# Altium PCB 主板-霍尔BC接地.PcbDoc (part 6 of 6)
Units mm, origin at the board's own origin, x right, y up, seen from the top; angles counter-clockwise.
Board outline 97.69 x 103.45 mm, 2 copper layers (Top Layer, Bottom Layer); 83 components, 83 nets, 266 pads, 295 vias.
Unrouted connection lines stored in the file: 11.
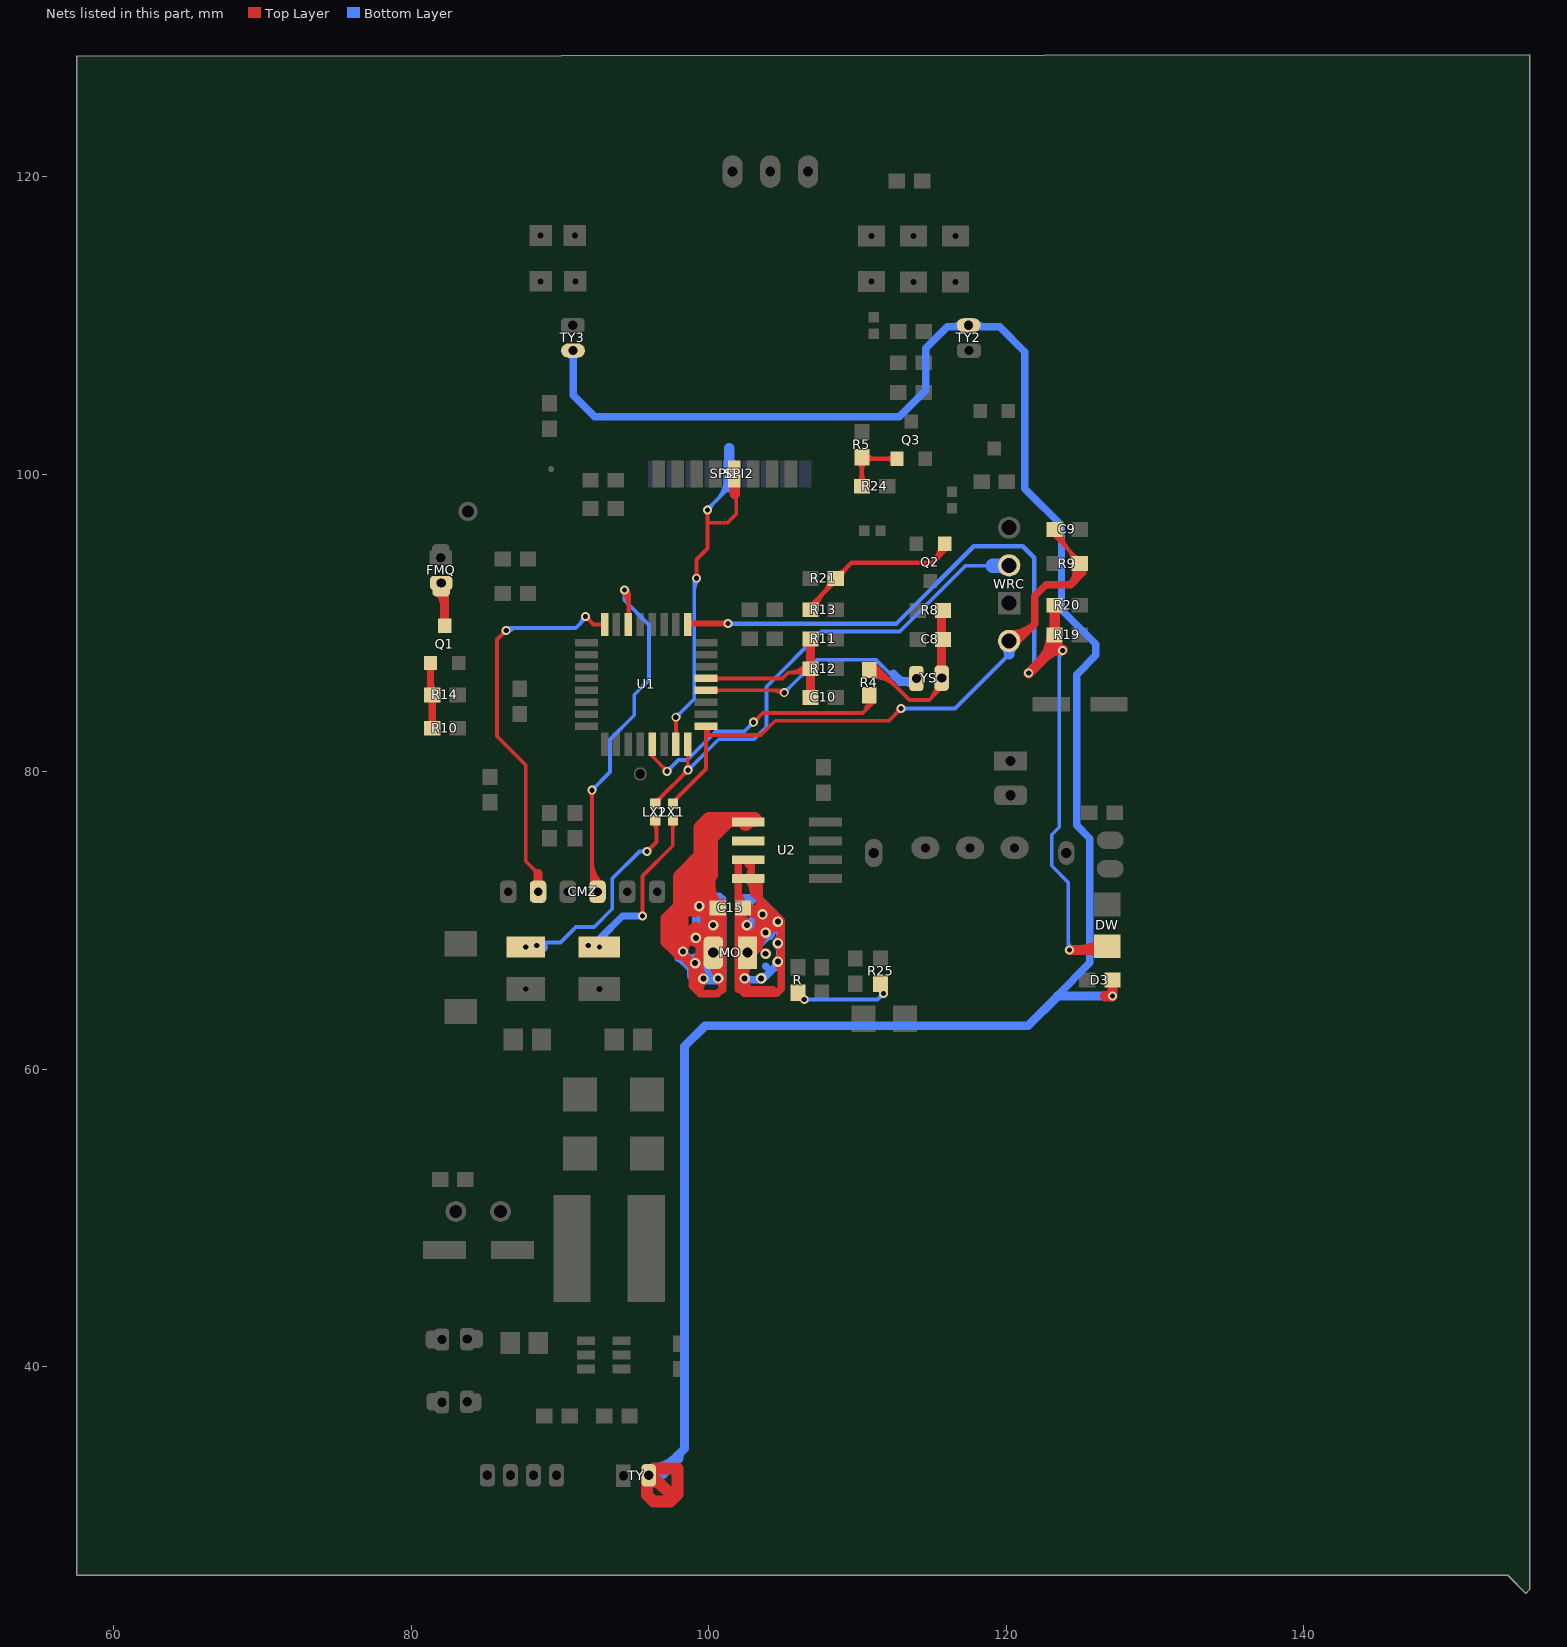
[diagram p6: the nets of this part, all layers, seen from the top]

## Via types
v1: diameter 0.6, hole 0.35, Top Layer to Bottom Layer, 117 vias
v2: diameter 0.7, hole 0.4, Top Layer to Bottom Layer, 104 vias
v3: diameter 0.8, hole 0.5, Top Layer to Bottom Layer, tented both sides, 32 vias
v4: diameter 0.8, hole 0.5, Top Layer to Bottom Layer, 15 vias
v5: diameter 1, hole 0.6, Top Layer to Bottom Layer, tented both sides, 5 vias
v6: diameter 1, hole 0.75, Top Layer to Bottom Layer, tented both sides, 5 vias
v7: diameter 3.4, hole 2.9, Top Layer to Bottom Layer, 4 vias
v8: diameter 0.65, hole 0.4, Top Layer to Bottom Layer, tented both sides, 2 vias
v9: diameter 0.8, hole 0.35, Top Layer to Bottom Layer, 2 vias
v10: diameter 0.7, hole 0.35, Top Layer to Bottom Layer, 2 vias
v11: diameter 1.1, hole 0.68, Top Layer to Bottom Layer, 2 vias
v12: diameter 0.62, hole 0.4, Top Layer to Bottom Layer, 1 vias
v13: diameter 0.95, hole 0.5, Top Layer to Bottom Layer, 1 vias
v14: diameter 0.9, hole 0.5, Top Layer to Bottom Layer, tented both sides, 1 vias
v15: diameter 0.7, hole 0.4, Top Layer to Bottom Layer, tented bottom, 1 vias
v16: diameter 0.8, hole 0.5, Top Layer to Bottom Layer, tented bottom, 1 vias

## Nets (pads, with @x,y where several pads share a name; then routed paths per layer and width w, separated by ;. In a path a pad name is that pad's centre, name@x,y a point inside that pad or via, vN(x,y) a via of type N, cw(c..) or ccw(c..) an arc to the next point about the centre after c; other vN are vias at no path point) (continued)
NetC4_1: C15.1 MO.2 U2.5 U2.6 | length 212.1
  Top Layer w0.254: 97.198,68.588 ccw(c98.273,69.662) v2@98.273,68.143 ; 97.206,69.723 97.231,69.698 ; 97.231,70.202 97.231,69.698 ; 97.447,67.958 97.585,67.958 97.828,67.958 ; 97.632,68.154 ccw(c98.273,68.795) v2@98.273,67.889 ; 97.642,67.958 cw(c97.642,67.289) v2@98.115,67.762 ; 97.826,67.958 ccw(c97.826,68.366) v2@98.115,68.077 ; v2@98.078,67.811 ccw(c97.828,67.672) 97.828,67.958 ; v2@98.114,68.077 cw(c97.828,68.361) 97.828,67.958 ; 97.079,69.367 97.231,69.52 97.231,69.647 ; 97.079,69.367 96.977,69.266 96.977,68.809 97.024,68.762 97.828,67.958 ; 97.079,69.367 97.561,69.367 97.257,69.672 ; 97.079,69.367 96.952,69.367 97.231,69.647 ; 97.231,69.647 97.257,69.672 ; 97.231,69.647 97.231,69.698 ; 97.231,69.698 97.257,69.672
  Top Layer w0.5: 97.184,69.295 97.561,69.672 97.565,69.676 ; 97.909,67.869 ccw(c97.909,68.284) 98.202,67.99 ccw(c97.725,68.468) 98.4,68.468 ; 98.091,70.202 97.024,70.202 ; v2@98.095,67.869 v2@98.146,67.818 ; 98.095,70.206 98.4,70.51 ; 98.095,70.507 98.098,70.51 98.4,70.51 ; 98.095,71.272 97.024,70.202 ; v2@98.178,67.608 ccw(c99.085,68.516) 99.085,67.232 cw(c99.085,67.903) 98.611,67.429 ; 98.179,68.301 98.4,68.301 ; v2@98.201,67.989 cw(c97.917,68.263) 97.917,67.869 ; v2@98.225,68.008 ccw(c98.066,68.301) 98.4,68.301 ; v2(98.273,67.92) 97.968,67.818 v2@98.146,67.818 ; v2@98.294,67.67 v2@98.146,67.818 ; v2@98.371,67.939 ccw(c99.474,68.159) v2@98.912,67.184 ; 98.551,67.489 cw(c98.982,67.92) 98.373,67.92 ccw(c99.595,67.92) 98.731,67.055 ; 98.882,66.4 cw(c99.817,66.4) v2@99.156,67.061 ; v2@98.882,67.158 98.222,67.818 v2@98.146,67.818 ; v2@99.015,67.061 cw(c98.108,66.155) v2@99.39,66.155 ; v2@99.015,67.203 ccw(c98.108,68.109) 99.39,68.109 ; v2@99.065,68.763 cw(c98.282,67.979) 99.39,67.979 ; 99.068,70.448 ccw(c98.807,70.841) v2@99.267,70.946 ; v2@99.093,68.924 ccw(c98.872,69.393) 99.39,69.393 ; 99.218,66.798 ccw(c100.205,67.063) v2@99.694,66.177 ; v2@99.269,70.939 cw(c98.858,70.814) 99.162,70.51 ; v2@99.278,71.018 cw(c98.4,71.525) 98.4,70.51 ; 99.307,68.472 ccw(c99.245,68.604) v2@99.39,68.604 ; v2@99.365,71.068 ccw(c99.365,71.922) 99.969,71.318 ; 99.39,65.236 cw(c100.499,65.236) v2@99.715,66.02 ; 99.39,66.945 ccw(c100.499,66.945) v2@99.715,66.162 ; v2@99.391,71.064 ccw(c99.573,71.738) 99.922,71.133 ; v2@99.442,71.031 ccw(c100.22,71.673) C15.1@100.124,70.669 ; v2@99.597,70.946 cw(c100.217,70.325) C15.1@100.697,71.059 ; 99.974,71.323 99.162,70.51 ; MO.2@100.025,68.573 ccw(c97.818,70.781) C15.1@100.94,70.781 ; MO.2@100.069,67.07 cw(c98.769,65.331) 100.94,65.331 ; MO.2@100.11,68.693 ccw(c99.306,69.266) v2@100.213,69.658 ; v2@100.252,69.782 ccw(c99.445,71.073) C15.1@100.928,70.731 ; v2@100.273,69.603 ccw(c100.002,68.781) 99.39,69.393 ; C15.1@100.31,70.839 cw(c99.161,70.79) 99.974,69.977 ; v2@100.31,69.797 ccw(c100.338,70.267) 100.797,70.162 ; MO.2@100.368,67.47 cw(c99.515,66.329) 100.94,66.329 ; MO.2@100.379,68.22 ccw(c99.025,69.574) 100.94,69.574 ; 100.402,66.634 cw(c99.86,66.22) v2@100.536,66.129 ; v2@100.401,69.724 cw(c101.33,69.973) 100.65,70.653 99.974,69.977 ; C15.1@100.423,70.641 ccw(c99.873,69.799) 99.162,70.51 ; C15.1@100.483,70.673 cw(c99.381,69.571) 100.94,69.571 ; v2@100.564,66.187 ccw(c99.658,67.093) MO.2@100.94,67.093 ; v2@100.579,66.034 cw(c100.149,65.403) 100.899,65.545 ; v2@100.58,66.033 cw(c100.142,65.366) 100.94,65.366 ; C15.1@100.94,71.245 100.94,65.43 100.584,65.075 99.416,65.075 99.314,65.176 ; 97.024,70.202 97.024,68.762 97.024,68.518 97.585,67.958 97.928,67.615 98.171,67.615 98.882,66.904 98.882,65.608 99.314,65.176 ; 97.917,67.869 97.739,67.869 97.828,67.958 97.917,67.869 ; 98.4,68.301 98.4,68.69 98.4,70.51 ; 98.4,70.51 99.162,70.51 ; 99.314,65.176 99.39,65.176 99.39,69.393 ; 99.39,69.393 99.974,69.977
  Top Layer w1: 97.561,69.672 97.561,69.367 97.561,68.918 98.095,68.385 ; 97.565,69.676 98.091,70.202 ; 98.098,70.51 98.505,70.917 98.628,70.917 ; v2@98.123,67.92 cw(c99.313,67.92) 98.471,68.761 ; 98.179,68.301 98.095,68.385 ; 98.381,68.671 cw(c99.136,67.916) v2@99.136,68.984 ; 98.984,71.525 ccw(c99.922,71.525) v2@99.259,70.862 ; v2@99.002,68.766 cw(c99.485,69.01) 99.103,69.393 98.4,68.69 ; v2@99.193,68.973 cw(c98.722,67.812) MO.2@99.974,67.812 ; v2@99.206,68.701 ccw(c98.531,69.977) 99.974,69.977 ; v2@99.409,71.111 ccw(c99.18,70.365) 98.628,70.917 ; v2@99.471,70.862 ccw(c98.255,72.077) 99.974,72.077 ; v2@99.471,71.074 cw(c98.255,69.858) 99.974,69.858 ; 99.974,69.263 cw(c100.74,69.263) v2@100.199,69.804 ; 99.974,69.436 cw(c101.974,69.436) C15.1@100.56,70.85 ; 99.974,69.458 ccw(c101.476,69.458) MO.2@100.414,68.396 ; 99.974,70.133 ccw(c100.74,70.133) v2@100.199,69.592 ; 99.974,71.323 99.974,69.977 ; 99.974,71.425 99.974,73.228 ; 99.974,72.264 ccw(c101.974,72.264) C15.1@100.56,70.85 ; 99.974,75.082 99.974,73.228 ; 99.999,69.526 cw(c100.478,69.398) v2@100.23,69.828 ; MO.2@100.533,67.691 99.974,68.25 99.974,69.977 ; 101.346,76.784 100.127,75.565 100.127,73.076 99.974,73.228 ; U2.5@102.489,76.505 U2.5@102.768,76.784 ; U2.5@103.073,76.784 100.025,76.784 99.466,76.225 99.466,74.32 98.095,72.949 98.095,71.272 98.095,70.507 98.095,70.206 98.095,68.385 ; 98.095,68.385 98.4,68.69 ; 98.4,68.69 cw(c99.111,67.978) 99.141,68.984 ccw(c99.111,67.978) 98.4,68.69 ; 98.4,68.69 ccw(c99.08,68.009) 98.124,67.903 cw(c99.08,68.009) 98.4,68.69 ; 98.628,70.917 98.984,71.272 98.984,73.863 99.162,74.041 99.974,73.228 ; C15.1@100.56,70.85 ccw(c101.211,69.799) 99.974,69.799 cw(c101.211,69.799) C15.1@100.56,70.85 ; 99.957,69.923 ccw(c100.522,70.074) 100.23,69.568 cw(c100.522,70.074) 99.957,69.923
  Bottom Layer w0.5: 97.968,67.451 cw(c98.341,67.451) v2@98.287,67.821 ; v2(98.273,67.92) 98.781,67.412 98.781,66.751 ; v2@98.372,67.909 ccw(c99.786,67.757) 98.781,66.751 ; v2@98.373,67.92 cw(c99.411,67.92) 98.677,68.654 ; 98.489,68.466 cw(c99.136,67.818) v2@99.136,68.734 ; 98.781,66.24 cw(c99.865,66.24) v2@99.151,67.057 ; v2@98.781,67.247 cw(c99.064,67.247) 99.012,67.525 ; v2@99.066,67.23 cw(c98.829,68.426) 97.968,67.564 ; 99.127,66.405 ccw(c99.644,66.923) v2@99.644,66.191 ; v2(99.136,68.834) v2@99.136,69.113 ; 99.136,70.196 cw(c100.106,70.196) v2@99.434,70.895 ; v2@99.185,67.12 ccw(c100.605,66.95) v2@99.593,65.938 ; v2@99.233,68.808 cw(c100.264,68.532) 99.73,69.457 ; v2@99.236,68.834 cw(c100.152,68.834) 99.504,69.482 ; 99.274,66.491 ccw(c99.839,66.817) v2@99.67,66.187 ; v2@99.277,70.919 cw(c98.546,70.517) 99.136,69.926 ; v2@99.279,70.917 cw(c98.838,70.657) 99.2,70.295 ; 99.293,70.201 99.2,70.294 ; 99.365,70.568 ccw(c99.365,70.828) 99.549,70.644 ; v2@99.365,71.068 ccw(c99.365,72.535) 100.403,71.498 ; v2@99.387,71.065 ccw(c99.685,72.374) 100.635,71.425 ; v2@99.465,70.968 cw(c100.258,70.968) 99.697,71.529 ; v2@99.565,66.151 cw(c99.136,66.476) 99.136,65.938 ; v2@99.596,66.178 cw(c99.265,66.779) 98.781,66.294 ; 99.6,69.698 cw(c100.045,69.698) 99.73,70.012 ; v2(99.644,66.091) v2@99.924,65.938 ; 99.656,70.751 ccw(c99.412,70.995) 99.709,71.171 ; v2@99.657,66.027 99.67,66.04 MO.2@99.67,67.081 ; v2@99.715,66.162 ccw(c100.254,66.7) 100.254,65.938 ; 99.827,69.22 cw(c99.136,69.911) 99.136,68.934 ccw(c99.136,70.954) v2@100.564,69.526 ; MO.2@99.829,68.79 ccw(c98.921,69.698) v2@100.205,69.698 ; 99.916,69.604 cw(c100.331,69.704) 100.029,70.006 ; MO.2@99.918,68.203 ccw(c99.543,68.12) 99.543,68.504 ; 99.964,65.938 ccw(c99.964,66.787) 100.564,66.187 ccw(c99.658,67.093) MO.2@100.94,67.093 ; MO.2@99.971,68.075 ccw(c99.187,67.573) v2@99.187,68.504 ; 99.99,69.967 cw(c100.305,69.653) 100.305,70.098 ; 100,71.068 ccw(c100,71.738) 100.474,71.264 ; 100.041,71.059 ccw(c100.373,71.788) 100.94,71.222 ; 100.051,66.497 100.127,66.573 100.584,66.116 v2@100.584,69.545 ; 100.076,71.032 cw(c100.426,71.329) 100.101,71.653 ; MO.2@100.078,67.063 cw(c99.389,66.087) v2@100.584,66.087 ; MO.2@100.088,68.624 ccw(c99.481,69.545) v2@100.584,69.545 ; MO.2@100.099,68.632 ccw(c99.185,70.129) 100.94,70.129 ; 100.1,70.968 cw(c100.648,70.968) 100.26,71.355 ; MO.2@100.196,67.006 cw(c99.905,66.014) v2@100.94,66.014 ; v2@100.234,69.627 cw(c99.389,68.782) MO.2@100.584,68.782 ; v2@100.305,69.598 ccw(c100.305,67.946) v2@99.137,69.114 ; v2@100.328,69.795 ccw(c100.466,70.376) 100.889,69.954 ; MO.2@100.336,67.486 cw(c100.1,66.681) 100.94,66.681 ; v2@100.343,69.79 ccw(c100.511,70.192) 100.819,69.884 100.889,69.954 ; MO.2@100.36,68.205 ccw(c99.729,69.238) 100.94,69.238 ; v2@100.402,69.721 cw(c101.349,69.949) 100.66,70.637 ; 100.482,66.467 ccw(c100.902,66.58) v2@100.685,66.203 ; 100.584,66.48 ccw(c100.999,66.48) v2@100.706,66.187 ; 97.968,67.564 98.781,66.751 ; 97.968,67.564 97.968,67.945 v2@99.136,69.113 ; 98.781,66.294 98.781,66.751 ; 98.781,66.294 99.136,65.938 ; 98.781,66.751 v2@99.593,65.938 ; 99.136,65.938 v2@99.593,65.938 ; v2@99.136,69.113 100.66,70.637 ; v2@99.136,69.113 99.136,69.926 ; 99.136,69.926 100.635,71.425 ; 99.136,69.926 99.136,70.231 ; 99.136,69.926 99.644,69.926 100.94,71.222 ; 99.136,70.231 99.2,70.294 ; 99.136,70.231 99.136,70.688 ; 99.136,70.688 100.101,71.653 ; 99.136,70.688 99.136,70.968 99.822,71.653 100.101,71.653 ; v2@99.187,68.504 99.543,68.504 ; v2@99.187,68.504 99.187,68.58 v2(100.305,69.698) 100.736,70.129 100.889,70.129 ; 99.2,70.294 100.482,71.577 100.635,71.425 ; 99.543,68.504 v2@100.584,69.545 ; v2@99.593,65.938 v2@99.924,65.938 ; v2@99.924,65.938 100.711,65.938 100.94,66.167 100.94,70.129 ; 100.101,71.653 100.508,71.653 ; 100.508,71.653 100.711,71.653 100.94,71.425 100.94,71.222 ; 100.508,71.653 100.94,71.222 ; 100.66,70.637 100.94,70.637 ; 100.889,69.954 100.889,70.129 ; 100.889,70.129 100.94,70.129 ; 100.94,70.129 100.94,70.637 ; 100.94,70.637 100.94,71.222 ; 98.781,66.644 cw(c99.177,66.644) 99.104,67.034 ccw(c99.177,66.644) 98.781,66.644
  other v2: 100.635,66.116 99.085,67.132 99.365,70.968
NetC4_2: C15.2 MO.1 U2.7 U2.8 | length 160.8
  Top Layer w0.5: U2.8@101.819,72.782 cw(c101.427,72.39) 101.981,72.39 ; U2.8@101.819,72.852 ccw(c101.427,73.244) 101.981,73.244 ; U2.7@101.819,74.052 cw(c101.427,73.66) 101.981,73.66 ; U2.7@101.824,74.047 cw(c101.598,73.738) 101.981,73.738 ; 101.981,65.369 cw(c102.672,65.369) v2@102.446,66.022 ; 101.981,66.077 cw(c102.938,66.077) MO.1@102.707,67.005 ; 101.981,66.717 cw(c102.778,66.717) MO.1@102.586,67.49 ; MO.1@101.981,67.4 ccw(c103.697,67.4) v2@102.484,66.187 ; MO.1@101.981,68.046 cw(c104.217,68.046) v2@102.636,69.627 ; 101.981,69.571 ccw(c103.887,69.571) MO.1@102.539,68.223 ; 101.981,69.573 cw(c103.537,69.573) C15.2@102.437,70.673 ; C15.2@101.981,70.778 ccw(c105.094,70.778) MO.1@102.893,68.576 ; C15.2@101.981,71.349 ccw(c104.217,71.349) v2@102.636,69.768 ; 101.981,72.127 ccw(c103.537,72.127) C15.2@102.437,71.027 ; 101.981,73.762 101.981,66.237 ; C15.2@102.007,70.658 ccw(c103.37,70.958) v2@102.619,69.782 ; 102.112,70.182 ccw(c102.591,70.287) v2@102.57,69.798 ; C15.2@102.36,70.6 cw(c102.36,69.164) v2@103.375,70.179 ; MO.1@102.444,68.657 ccw(c101.76,70.151) v2@103.403,70.151 ; v2@102.508,66.147 cw(c103.322,66.406) MO.1@102.773,67.061 ; v2@102.511,66.098 ccw(c103.336,65.947) 102.743,65.354 ; C15.2@102.537,71.027 ccw(c103.084,71.574) 103.084,70.8 ; U2.8@102.619,72.782 cw(c101.656,71.812) 103.022,71.812 ; U2.8@102.619,72.852 ccw(c102.012,73.459) 102.87,73.459 ; U2.7@102.619,74.052 cw(c102.012,73.445) 102.87,73.445 ; MO.1@102.652,68.202 ccw(c102.116,69.373) 103.403,69.373 ; U2.7@102.654,73.787 102.87,73.787 102.87,72.568 U2.8@103.022,72.568 ; v2@102.661,69.668 ccw(c103.741,69.336) MO.1@102.814,68.689 ; MO.1@102.86,67.748 ccw(c102.472,68.594) 103.403,68.594 ; 102.896,70.456 ccw(c103.198,70.98) v2@103.561,70.496 ; U2.8@103.022,72.695 U2.8@103.022,72.568 ; 103.333,69.89 cw(c104.034,69.702) v2@103.671,70.33 ; 103.403,68.132 cw(c104.62,68.132) v2@103.895,69.109 ; 103.403,68.224 v2@103.403,70.151 ; 103.403,69.65 cw(c104.388,69.65) v2@103.692,70.346 ; 103.403,71.183 ccw(c104.388,71.183) v2@103.692,70.487 ; 103.403,71.501 103.022,71.882 U2.8@103.022,72.568 ; v2@103.522,70.428 ccw(c103.075,70.482) 103.393,70.8 ; v2@103.534,70.466 ccw(c102.826,70.873) 103.403,71.45 v2@104.877,69.977 ; v2@103.536,70.364 ccw(c102.755,69.882) C15.2@102.755,70.8 ; v2@103.607,70.515 cw(c103.466,71.511) C15.2@102.755,70.8 ; v2@103.645,70.319 cw(c103.958,69.058) v2@104.877,69.977 ; v2@103.72,70.403 ccw(c104.731,70.266) 104.01,69.545 ; v2@103.736,69.201 ccw(c102.583,69.331) v2@103.403,70.151 ; v2@103.827,70.366 ccw(c104.648,71.187) 104.648,70.026 cw(c104.648,70.82) 104.087,70.259 ; v2@103.888,69.274 cw(c104.439,70.151) v2@103.403,70.151 ; v2@103.912,69.126 cw(c104.8,68.395) 104.8,69.545 ; 104.058,70.136 ccw(c103.621,69.699) 103.621,70.316 cw(c103.621,69.331) v2@104.318,70.028 ; 104.215,70.359 cw(c103.862,69.748) v2@104.55,69.904 ; 104.239,70.073 ccw(c104.491,70.51) v2@104.622,70.023 ; 104.28,70.574 cw(c103.632,69.926) v2@104.548,69.926 ; 104.305,65.354 102.743,65.354 ; 104.318,69.477 cw(c104.668,69.477) v2@104.652,69.826 ; 104.318,69.621 104.318,69.875 v2@103.48,70.714 ; v2@104.552,69.954 cw(c104.01,70.109) 104.01,69.545 ; v2@104.577,67.163 cw(c103.855,66.44) 104.877,66.44 ; v2@104.577,67.305 ccw(c103.855,68.027) 104.877,68.027 ; v2@104.577,68.408 cw(c103.855,67.685) 104.877,67.685 ; v2@104.577,68.549 ccw(c103.855,69.272) 104.877,69.272 ; v2@104.577,69.855 cw(c103.855,69.133) 104.877,69.133 ; v2@104.739,69.885 ccw(c105.014,69.759) 104.8,69.545 ; 101.981,66.237 101.981,65.507 102.387,65.1 104.572,65.1 104.877,65.405 v2@104.877,69.977 ; 101.981,66.237 101.981,66.116 102.743,65.354 ; C15.2@102.755,70.8 v2@103.403,70.151 ; C15.2@102.755,70.8 103.393,70.8 ; U2.8@103.022,72.568 103.403,72.568 103.403,70.79 ; 103.393,70.8 103.403,70.79 ; v2@103.403,70.151 103.403,70.714 ; v2@103.403,70.151 104.01,69.545 ; 103.403,70.714 v2@103.48,70.714 ; 103.403,70.714 103.403,70.79 ; 103.403,70.79 ccw(c103.682,70.79) 103.637,70.515 cw(c103.682,70.79) 103.403,70.79 ; 103.403,70.79 cw(c103.106,70.492) 103.522,70.431 ccw(c103.106,70.492) 103.403,70.79 ; 103.403,70.79 v2@103.48,70.714 ; v2@103.48,70.714 103.632,70.714 104.8,69.545 ; 104.01,69.545 104.8,69.545
  Bottom Layer w0.5: 102.064,70.629 ccw(c103.367,70.877) v2@102.621,69.78 ; v2@102.083,66.22 cw(c102.889,66.22) MO.1@102.703,67.004 ; MO.1@102.083,66.852 cw(c102.739,66.852) MO.1@102.587,67.491 ; MO.1@102.083,67.155 ccw(c103.451,67.155) 102.484,66.187 ccw(c102.9,66.603) 102.9,66.015 ; MO.1@102.083,68.291 cw(c103.972,68.291) v2@102.636,69.627 ; 102.083,69.325 ccw(c103.642,69.325) MO.1@102.539,68.223 ; 102.083,69.498 cw(c102.765,69.498) 102.282,69.98 ; 102.083,69.897 ccw(c102.765,69.897) 102.282,69.415 ; 102.083,70.532 ccw(c104.849,70.532) 102.893,68.576 cw(c103.561,69.245) 102.616,69.245 ; 102.083,70.671 cw(c102.938,70.671) 102.333,71.276 ; 102.083,71.104 ccw(c103.972,71.104) v2@102.636,69.768 ; 102.29,69.443 ccw(c102.407,69.465) 102.34,69.367 ; MO.1@102.61,68.193 ccw(c102.61,69.65) 103.64,68.62 ; MO.1@102.61,68.693 ccw(c102.61,71.357) 104.494,69.474 ; MO.1@102.616,68.17 v2@102.616,69.571 ; 102.616,69.274 cw(c101.63,69.274) 102.327,68.576 ccw(c101.038,69.869) 102.863,69.869 102.863,67.843 v2@104.616,69.596 ; 102.616,69.334 ccw(c102.201,69.334) 102.494,69.627 cw(c101.604,68.736) MO.1@102.863,68.736 ; v2@102.661,69.671 ccw(c103.801,69.35) MO.1@102.812,68.7 ; 102.715,70.981 cw(c103.327,70.91) 103.327,71.526 ; 102.848,69.98 cw(c102.811,69.943) 102.863,69.943 ; 103.044,66.015 ccw(c103.044,66.603) v2@103.46,66.187 ; MO.1@103.205,68.84 ccw(c102.993,69.699) v2@103.75,69.241 ; 103.4,68.38 ccw(c102.59,69.19) v2@103.735,69.19 ; v2@103.529,70.456 ccw(c102.644,70.843) 103.327,71.526 ; v2@103.53,66.216 ccw(c103.53,66.887) 104.005,66.413 ; v2@103.55,70.346 cw(c103.169,69.965) 103.708,69.965 ; v2@103.557,70.339 cw(c103.291,70.018) 103.708,70.018 ; v2@103.565,70.334 cw(c103.088,69.631) 103.937,69.631 ; v2@103.621,70.316 cw(c103.621,69.654) 104.09,70.122 ; 103.632,69.922 ccw(c104.567,69.922) v2@103.906,69.26 ; v2@103.656,70.323 cw(c104.025,69.329) v2@104.775,70.079 ; v2@103.696,70.35 ccw(c103.927,70.145) 103.708,69.926 ; v2@103.719,70.398 ccw(c104.494,70.254) 103.937,69.698 ; v2@103.755,69.25 ccw(c103.343,69.561) 103.708,69.926 ; v2@103.784,69.275 ccw(c103.622,69.545) 103.937,69.545 ; 103.83,66.934 103.988,66.777 ; v2@103.839,69.29 ccw(c103.875,70.337) v2@104.616,69.596 ; v2@103.85,69.288 ccw(c103.969,70.073) 104.44,69.434 ; v2@103.927,69.149 cw(c104.616,68.841) v2@104.616,69.596 ; v2@103.93,69.157 cw(c104.648,68.914) 104.648,69.672 104.006,69.672 ccw(c104.006,70.331) v2@104.563,69.98 ; v2@104.011,69.247 ccw(c103.432,70.25) v2@104.551,69.952 ; 104.115,69.52 cw(c103.806,69.211) 104.155,68.949 ; 104.202,70.409 cw(c103.845,69.79) v2@104.549,69.91 ; 104.266,69.246 ccw(c103.587,69.926) 104.548,69.926 ccw(c103.632,69.926) 104.28,70.574 ; 104.352,66.76 ccw(c103.877,67.234) v2@104.548,67.234 ; v2@104.554,69.96 cw(c104.038,70.143) 104.038,69.596 ; v2@104.577,67.305 ccw(c104.1,67.782) 104.775,67.782 ; v2@104.577,68.408 cw(c104.1,67.93) 104.775,67.93 ; v2@104.577,68.549 ccw(c104.1,69.026) 104.775,69.026 ; v2@104.577,69.855 cw(c104.1,69.378) 104.775,69.378 ; v2@104.638,70.026 cw(c104.55,70.888) v2@103.937,70.275 ; 103.327,71.526 v2@104.775,70.079 ; 103.327,71.526 102.083,71.526 102.083,66.345 102.413,66.015 103.607,66.015 104.775,67.183 v2@104.775,70.079 ; 103.708,69.926 103.937,69.698 ; 103.708,69.926 103.708,70.028 103.632,69.952 103.632,69.494 103.759,69.367 103.937,69.545 ; v2@103.764,69.26 ccw(c103.348,69.676) 103.937,69.676 ; v2@103.764,69.26 ccw(c103.348,69.676) 103.937,69.676 ; v2@103.764,69.26 ccw(c103.348,69.676) 103.937,69.676 ; 103.937,69.545 103.937,69.698 ; 103.937,69.698 104.038,69.596 ; 103.937,69.698 v2@103.937,70.275 ; v2@103.937,70.275 v2@104.616,69.596 ; v2@103.937,70.275 103.48,70.732 103.625,70.732 103.937,70.421 v2@103.937,70.275 ; 104.038,69.596 v2@104.616,69.596
  other v2: 102.413,66.116 103.53,66.116 104.648,67.234 103.835,67.767 104.648,68.478 103.835,69.19 102.565,69.698 104.648,69.926 103.621,70.416
PB7: C10.1 R11.2 R12.2 U1.5 | length 14.2
  Top Layer w0.254: U1.5@99.825,86.277 104.946,86.277 105.333,86.664 ; U1.5@100.437,86.19 cw(c100.647,85.98) 100.647,86.277 cw(c100.647,86.574) U1.5@100.437,86.364 ; 105.915,86.664 ccw(c105.915,87.752) R12.2@106.713,87.013 ; R12.2@106.526,87.185 cw(c105.333,88.291) 105.333,86.664 ; R12.2@106.85,86.932 106.85,86.664 105.333,86.664
  Top Layer w0.6: C10.1@106.85,84.932 R12.2@106.85,86.932 R11.2@106.85,88.932
PC0: 
Q1-B: Q2.1 R13.1 R21.2 | length 18.3
  Top Layer w0.3: R13.1@106.85,90.9 106.85,91.153 108.55,92.853 R21.2@108.55,93 109.606,94.056 115.062,94.056 ; R13.1@106.95,90.9 cw(c107.802,90.9) 107.199,91.502 ; R13.1@107.25,90.9 cw(c108.826,90.9) 107.712,92.014 ; 107.763,92.066 ccw(c106.829,93) R21.2@108.15,93 ; R21.2@108.239,92.542 cw(c108.5,92.281) R21.2@108.5,92.65 ; R21.2@108.6,93.35 ccw(c108.6,94.074) 109.112,93.562 ; R21.2@108.95,93 cw(c109.916,93) 109.233,93.683 ; 115.557,94.552 ccw(c114.827,95.282) Q2.1@115.86,95.307 ; Q2.1@115.56,95.299 cw(c113.86,95.259) 115.062,94.056 ; Q2.1@115.961,95.459 115.961,94.955 115.062,94.056
Q1-C: 
Q2-C: 
Q2-E: FMQ.2 pad.0@82.017,92.38 Q1.3 | length 5.2
  Top Layer w0.6: pad.0@81.804,92.168 cw(c80.74,91.104) 82.245,91.104 ; FMQ.2@82.017,92.698 81.819,92.501 82.245,92.075 Q1.3@82.245,89.82 ; pad.0@82.245,92.163 cw(c82.822,92.163) 82.414,92.571 ccw(c82.822,92.163) pad.0@82.245,92.163
Q3-B: Q3.1 R5.1 R24.2 | length 10.2
  Top Layer w0.3: R5.1@110.053,100.853 cw(c109.455,100.255) 110.3,100.255 cw(c111.145,100.255) 110.547,100.853 cw(c111.024,100.376) 111.024,101.05 ; R24.2@110.059,99.448 ccw(c109.478,100.029) 110.3,100.029 ; 110.3,100.062 ccw(c111.168,100.062) R24.2@110.554,99.448 ; R5.1@110.3,101.15 110.3,99.207 R24.2@110.307,99.2 ; R5.1@110.363,101.371 110.684,101.05 112.208,101.05 ; R5.1@110.547,101.347 ccw(c111.266,102.066) 111.266,101.05 ; Q3.1@112.389,100.931 ccw(c112.208,100.853) 112.208,101.05 ; Q3.1@112.389,101.169 cw(c112.208,101.247) 112.208,101.05 ; Q3.1@112.452,100.838 ccw(c111.94,100.326) 111.94,101.05 ccw(c111.94,101.774) Q3.1@112.452,101.262 ; Q3.1@112.878,101.041 112.217,101.041 112.208,101.05
R7: 
R10: 
R19: DW.2 R19.2 R20.2 U1.9 | length 68.8
  Top Layer w0.4: U1.9@98.6,89.967 v1(101.3,89.967) ; U1.9@98.635,89.867 cw(c98.876,89.626) 98.876,89.967
  Top Layer w0.7: v1@121.526,86.627 123.45,88.55 ; 122.308,87.408 ccw(c120.516,89.2) R19.2@123.05,89.2 ; 122.628,87.728 cw(c123.8,86.556) v1@123.8,88.213 ; R19.2@123.266,89.184 123.266,90.875 R20.2@123.45,91.059 ; v1(124.257,68.021) DW.2@126.771,68.021 ; 125.008,68.021 ccw(c125.008,69.965) DW.2@126.382,68.59
  Bottom Layer w0.254: v1@123.64,88.098 cw(c123.349,87.979) 123.571,87.757 ; v1@123.8,87.986 123.571,87.757 ; 124.181,68.623 ccw(c124.858,68.623) v1@124.379,68.144 ; v1@124.258,68.023 124.181,68.101 124.181,72.568 123.063,73.685 123.063,75.768 123.571,76.276 123.571,87.757
  Bottom Layer w0.3: v1(101.3,89.967) 112.624,89.967 117.831,95.174 121.107,95.174 121.895,94.386 121.895,87.02 v1(121.514,86.639) ; v1@101.406,89.861 cw(c101.662,89.605) 101.662,89.967 cw(c101.662,90.329) v1@101.406,90.073 ; v1@121.514,86.789 ccw(c121.514,87.152) 121.77,86.895 ccw(c122.026,86.639) v1@121.664,86.639
  other v1: 123.8,88.163
R21: Q1.1 R10.1 R14.2 | length 7.9
  Top Layer w0.5: Q1.1@81.154,87.153 cw(c80.812,86.812) 81.295,86.812 cw(c81.778,86.812) Q1.1@81.437,87.153 ; R10.1@81.244,83.108 ccw(c80.817,83.535) 81.421,83.535 ccw(c82.024,83.535) R10.1@81.597,83.108 ; R14.2@81.244,84.993 cw(c80.817,84.566) 81.421,84.566 cw(c82.024,84.566) R14.2@81.597,84.993 ; R14.2@81.295,84.912 Q1.1@81.295,87.32 ; 81.295,85.956 ccw(c82.156,85.956) R14.2@81.547,85.347 ; R10.1@81.421,82.931 R14.2@81.421,85.09
R-R: R25.2 R.2 | length 6.8
  Bottom Layer w0.254: v1(106.426,64.694) 111.354,64.694 v1(111.76,65.1) ; v1@106.548,64.571 cw(c106.844,64.276) 106.844,64.694 cw(c106.844,65.111) v1@106.548,64.816 ; v1@111.587,65.1 cw(c111.169,65.1) 111.465,64.805 cw(c111.76,64.51) v1@111.76,64.927
RST: 
RST/BI: C9.2 LX1.1 LX1.2 pad.0@92.65,68.222 R9.1 U1.1 WRC.1 | length 71.7
  Top Layer w0.254: v1@95.432,70.43 ccw(c95.151,70.711) 95.549,70.711 ; v1@95.549,70.307 95.549,72.994 97.585,75.03 LX1.1@97.585,76.757 ; 95.549,70.739 ccw(c95.987,70.739) v1@95.677,70.43 ; LX1.1@97.442,76.584 cw(c97.098,76.24) 97.585,76.24 ; 97.585,76.167 cw(c98.175,76.167) LX1.1@97.758,76.584 ; LX1.2@97.6,77.915 97.845,78.16 97.845,78.21 ; LX1.2@97.8,77.94 cw(c98.011,78.044) 97.845,78.21 ; U1.1@99.738,82.99 cw(c99.528,82.781) 99.825,82.781 cw(c100.122,82.781) U1.1@99.912,82.99 ; U1.1@99.748,82.982 cw(c99.36,82.501) 99.977,82.501 ; U1.1@99.977,83.122 U1.1@99.977,83.077 ; U1.1@100.082,82.931 U1.1@100.076,82.925 ; v1@112.755,84.252 cw(c112.338,84.252) 112.633,83.956 cw(c112.928,83.661) v1@112.928,84.079 ; v1@112.878,84.252 v1(112.928,84.252) 112.116,83.439 104.47,83.439 103.505,82.474 100.025,82.474 99.977,82.522 U1.1@99.977,82.904 ; C9.2@123.165,96.3 ccw(c123.984,96.3) 123.405,95.721 ; C9.2@123.419,96.3 ccw(c124.852,96.3) 123.839,95.287 ; C9.2@123.45,96.3 123.25,96.1 123.25,95.876 R9.1@125.12,94.005 ; C9.2@123.673,96.3 ccw(c125.719,96.3) 124.272,94.854 ; 124.104,95.022 cw(c123.081,94) R9.1@124.527,94 ; 124.537,94.589 cw(c123.949,94) R9.1@124.781,94 ; R9.1@124.649,94.477 ccw(c124.9,94.728) R9.1@124.9,94.373 ; 97.845,78.21 98.214,78.58 98.214,78.584 99.825,80.194 U1.1@99.825,82.904 ; U1.1@99.825,82.904 U1.1@99.825,83.077 ; U1.1@99.825,82.904 U1.1@99.977,82.904 ; U1.1@99.825,83.077 100.228,83.077 U1.1@100.076,82.925 ; U1.1@99.825,83.077 U1.1@99.977,83.077 ; U1.1@99.977,82.904 U1.1@99.977,83.077 ; U1.1@99.977,82.904 100.076,82.904 U1.1@100.076,82.925
  Top Layer w0.5: WRC.1@120.23,89.299 ccw(c120.36,91.501) 121.92,89.941 ; 121.133,89.155 cw(c120.272,90.016) WRC.1@120.2,88.8 120.779,88.8 121.92,89.941 ; R9.1@124.662,93.925 cw(c123.391,93.525) 124.333,92.583 ; R9.1@124.897,93.772 cw(c124.722,93.382) 125.15,93.382 ; 124.916,93.166 ccw(c124.278,93.804) R9.1@125.138,94.075 ; R9.1@125.12,94.005 125.15,93.976 125.15,93.4 124.333,92.583 ; 121.92,89.941 121.92,91.821 122.682,92.583 124.333,92.583
  Top Layer w0.7: pad.0@92.75,68.182 pad.0@93.337,68.182
  Bottom Layer w0.254: v1@112.878,84.252 116.561,84.252 120.2,87.891 ; v1@113.051,84.129 cw(c113.346,83.834) 113.346,84.252 cw(c113.346,84.669) v1@113.051,84.374
  Bottom Layer w0.3: pad.0@92.75,68.182 pad.0@92.75,68.849
  Bottom Layer w0.5: pad.0@92.75,68.849 94.209,70.307 v1(95.555,70.307)
  Bottom Layer w0.7: WRC.1@119.93,88.505 cw(c119.368,87.891) 120.2,87.891 ; WRC.1@120.2,88.8 120.2,87.891 ; WRC.1@120.47,88.505 ccw(c121.032,87.891) 120.2,87.891
  other v9: 91.897,68.326
RT: 
SCK: SPI1.4 SPI2.4 U1.31 | length 37.8
  Top Layer w0.254: v1@97.668,83.545 cw(c97.348,83.226) 97.8,83.226 ; U1.31@97.713,82.464 ccw(c97.503,82.674) 97.8,82.674 ccw(c98.097,82.674) U1.31@97.887,82.464 ; U1.31@97.8,81.853 v1@97.8,83.668 ; 97.8,83.274 cw(c98.183,83.274) v1@97.912,83.545 ; v1@99.065,93.137 ccw(c98.769,93.432) 99.187,93.432 ccw(c99.605,93.432) v1@99.309,93.137 ; v1(99.187,93.015) 99.187,94.285 99.924,95.021 99.924,96.749 ; v1@99.801,97.49 cw(c99.506,97.195) 99.924,97.195 cw(c100.341,97.195) v1@100.046,97.49 ; v1(99.924,97.612) 99.924,96.749 ; 100.508,96.749 99.924,96.749 ; SPI1.4@101.516,99.346 cw(c100.701,98.531) 101.854,98.531 ; SPI1.4@101.696,99.526 cw(c101.314,99.144) 101.854,99.144 cw(c102.14,99.144) SPI1.4@101.938,99.346 ; SPI1.4@101.727,100.032 SPI1.4@101.727,100.406 ; SPI1.4@101.854,100.406 101.854,97.333 101.27,96.749 99.924,96.749
  Top Layer w0.7: SPI1.4@101.727,100.406 SPI1.4@101.759,99.955 ; 101.752,98.679 SPI1.4@101.752,100.21
  Bottom Layer w0.254: v1@97.79,83.841 ccw(c97.79,84.283) 98.103,83.97 ; v1@97.8,83.668 99.035,84.902 99.035,92.862 v1(99.187,93.015) ; v1@97.963,83.668 cw(c98.356,83.668) 98.078,83.946 ; 99.035,92.229 cw(c99.973,92.229) v1@99.309,92.892 ; v1@99.898,97.638 SPI2.4@101.397,99.136 ; v1@99.924,97.785 ccw(c99.924,98.08) 100.132,97.872 ; v1@100.097,97.612 cw(c100.637,97.612) 100.255,97.994 ; 100.613,98.353 ccw(c99.409,99.557) SPI2.4@101.112,99.557 ; 101.047,98.786 ccw(c100.276,99.557) SPI2.4@101.366,99.557
  Bottom Layer w0.7: SPI2.4@101.397,99.136 101.397,101.752
  other v1: 97.79,83.668
SWIM: LX2.1 LX2.2 pad.0@87.7,68.222 U1.32 WRC.3 | length 53.2
  Top Layer w0.254: v1(95.86,74.651) 96.495,75.286 96.495,76.547 LX2.1@96.3,76.742 ; v1@95.86,74.824 ccw(c95.86,75.241) 96.155,74.946 ccw(c96.45,74.651) v1@96.033,74.651 ; LX2.1@96.242,76.584 cw(c95.633,75.975) 96.495,75.975 ; LX2.2@96.4,78.065 ccw(c96.4,78.436) LX2.2@96.662,78.174 ; LX2.2@96.601,78.113 v1(98.6,80.112) U1.32@98.6,81.852 ; LX2.2@96.623,77.842 cw(c97.329,77.842) 96.83,78.341 ; v1@98.427,80.112 cw(c98.009,80.112) 98.305,79.816 cw(c98.6,79.521) v1@98.6,79.939 ; v1@98.478,80.234 ccw(c98.182,80.529) 98.6,80.529 ccw(c99.018,80.529) v1@98.722,80.234 ; U1.32@98.513,81.24 cw(c98.303,81.031) 98.6,81.031 cw(c98.897,81.031) U1.32@98.687,81.24
  Top Layer w0.3: LX2.2@96.3,77.842 96.571,78.113 LX2.2@96.601,78.113
  Bottom Layer w0.254: 89.103,68.529 90.043,68.529 91.084,69.571 92.304,69.571 93.523,70.79 93.523,72.822 95.352,74.651 v1(95.86,74.651) ; v1@95.737,74.528 ccw(c95.442,74.233) 95.442,74.651 ccw(c95.442,75.068) v1@95.737,74.773 ; v1(98.6,80.112) 100.683,82.194 103.048,82.194 103.886,83.033 103.886,85.725 107.594,89.433 112.841,89.433 117.261,93.853 119.126,93.853 ; v1@98.6,80.285 ccw(c98.6,80.702) 98.895,80.407 ccw(c99.191,80.112) v1@98.773,80.112
  Bottom Layer w0.8: pad.0@87.6,68.182 pad.0@87.968,68.182 ; pad.0@87.986,68.199 88.773,68.199 pad.0@88.809,68.235
  Bottom Layer w1: 119.126,93.853 WRC.3@120.2,93.853
  other v9: 88.443,68.326
SWIM/BT: 
T-LED: 
TEMP: 
TS: 
TY: D3.2 TY2.1 TY3.1 TY.1 | length 166
  Top Layer w0.7: 126.644,64.922 v1@127.15,64.922 ; v1(127.15,64.92) D3.2@127.15,66
  Top Layer w0.8: TY.1@95.964,32.35 cw(c95.964,31.022) 96.903,31.961 ; TY.1@96.021,32.913 cw(c96.646,32.288) 96.646,33.172 ; TY.1@96.319,33.172 97.917,33.172 97.917,31.42 97.681,31.183 ; 97.681,31.183 97.444,30.947 96.282,30.947 95.86,31.369 95.86,33.004 97.681,31.183
  Bottom Layer w0.5: TY3.1@90.719,108.156 cw(c90.326,107.764) 90.881,107.764 cw(c91.436,107.764) TY3.1@91.044,108.156 ; TY3.1@90.881,108.419 90.881,105.308 92.329,103.861 112.801,103.861 114.605,105.664 114.605,108.483 116.041,109.919 119.57,109.919 121.26,108.229 121.26,99.035 123.723,96.571 123.723,90.907 126.035,88.595 126.035,87.833 124.739,86.538 124.739,76.403 125.628,75.514 125.628,67.158 123.393,64.922 ; 116.359,109.919 ccw(c116.359,110.815) TY2.1@116.992,110.182 ; TY2.1@117.958,110.182 ccw(c118.591,110.815) 118.591,109.919 ; 125.882,64.922 125.885,64.92 v1(127.15,64.92)
  Bottom Layer w0.6: 97.917,33.884 97.917,34.033 98.374,34.49 98.374,61.544 99.755,62.925 121.469,62.925 123.466,64.922 v1@127.15,64.922
  Bottom Layer w0.8: TY.1@95.964,32.25 ccw(c95.964,33.021) 96.509,32.476 ; TY.1@95.964,33.05 ccw(c95.964,35.753) 97.875,33.842 ; TY.1@96.064,32.8 96.808,32.8 ; 96.808,32.775 97.917,33.884
Y30: CMZ.6 U1.16 | length 30.3
  Top Layer w0.254: v1@86.212,89.51 cw(c85.795,89.51) 86.09,89.214 cw(c86.385,88.919) v1@86.385,89.337 ; v1(86.385,89.51) 85.776,88.9 85.776,82.398 87.706,80.467 87.706,73.99 88.53,73.166 ; v1@91.719,90.276 cw(c91.719,89.859) 92.015,90.154 cw(c92.31,90.449) v1@91.892,90.449 ; v1(91.719,90.449) 92.266,89.902 U1.16@93,89.902 ; U1.16@92.913,89.815 ccw(c92.703,89.605) 92.703,89.902 ccw(c92.703,90.199) U1.16@92.913,89.989
  Top Layer w0.6: CMZ.6@88.353,72.321 ccw(c87.926,72.747) 88.53,72.747 ccw(c89.134,72.747) CMZ.6@88.707,72.321 ; CMZ.6@88.53,71.944 88.53,73.166
  Bottom Layer w0.254: v1(86.385,89.51) 86.538,89.662 91.059,89.662 91.719,90.322 v1(91.719,90.449) ; v1@86.508,89.387 cw(c87.171,88.724) 87.171,89.662 ; 91.334,89.937 ccw(c90.822,90.449) v1@91.546,90.449
Y30-D: 
Y>: CMZ.4 U1.14 | length 33.4
  Top Layer w0.254: v1@92.029,78.643 cw(c91.734,78.348) 92.151,78.348 cw(c92.569,78.348) v1@92.274,78.643 ; 92.151,72.853 ccw(c93.239,72.853) CMZ.4@92.47,72.084 ; 92.151,73.466 ccw(c93.852,73.466) CMZ.4@92.649,72.263 ; 92.151,74.079 ccw(c94.466,74.079) CMZ.4@92.829,72.443 ; v1(92.151,78.765) 92.151,72.323 CMZ.4@92.53,71.944
  Top Layer w0.3: v1@94.23,92.121 cw(c93.299,91.191) 94.615,91.191 ; v1@94.336,92.077 cw(c94.336,91.715) 94.592,91.971 cw(c94.848,92.227) v1@94.486,92.227 ; v1(94.336,92.227) 94.615,91.948 94.615,89.917 U1.14@94.6,89.902 ; v1@94.442,92.333 cw(c94.023,91.915) 94.615,91.915 ; U1.14@94.529,90.498 ccw(c94.322,90.705) 94.615,90.705
  Bottom Layer w0.254: v1(92.151,78.765) 93.37,79.985 93.37,82.178 94.991,83.799 94.991,85.18 95.987,86.175 95.987,89.88 94.336,91.531 v1(94.336,92.227) ; v1@92.151,78.938 ccw(c92.151,79.356) 92.447,79.061 ccw(c92.742,78.765) v1@92.324,78.765 ; v1@94.213,92.105 cw(c93.918,91.81) 94.336,91.81 cw(c94.753,91.81) v1@94.458,92.105
YS: C8.2 R4.1 R8.1 YS.1 | length 21.8
  Top Layer w0.254: R4.1@110.8,86.427 cw(c110.8,83.719) 112.715,85.634 ; R4.1@110.8,86.681 cw(c110.8,84.586) 112.281,86.068 ; R4.1@110.8,86.935 cw(c110.8,85.454) 111.847,86.501 ; R4.1@110.8,87.189 cw(c110.8,86.321) 111.414,86.935 ; R4.1@110.846,87.147 111.201,87.147 113.513,84.836 114.833,84.836 115.664,85.667 YS.1@115.664,86.075 ; R4.1@110.981,86.474 cw(c111.367,85.78) 111.671,86.513 ; R4.1@111.145,86.943 ccw(c111.76,87.197) 111.505,86.582 ; 111.328,86.817 111.133,86.736 111.735,86.487 ; 114.875,84.878 ccw(c113.823,85.93) YS.1@115.311,85.93 ; 115.309,85.311 ccw(c114.69,85.93) YS.1@115.565,85.93
  Top Layer w0.6: YS.1@115.664,86.6 R8.1@115.664,90.881 ; 115.664,88.331 cw(c116.269,88.331) C8.2@115.841,88.759 ; 115.664,89.469 ccw(c116.269,89.469) C8.2@115.841,89.041 ; 115.664,90.287 cw(c116.269,90.287) R8.1@115.841,90.715
YS-U: R4.2 U1.29 | length 22.9
  Top Layer w0.254: U1.29@96.115,81.238 cw(c95.928,81.041) 96.2,81.041 ; U1.29@96.2,81.853 96.2,81.041 ; U1.29@96.285,81.238 ccw(c96.472,81.041) 96.2,81.041 ; v1@97.033,80.035 ccw(c96.615,80.035) 96.91,80.331 ccw(c97.206,80.626) v1@97.206,80.208 ; v1(97.206,80.035) 96.2,81.041 ; v1(103.022,83.337) 103.632,83.947 110.363,83.947 110.753,84.337 ; v1@103.022,83.51 ccw(c103.022,83.928) 103.318,83.633 ccw(c103.613,83.337) v1@103.195,83.337 ; R4.2@110.676,84.748 cw(c110.615,84.574) 110.8,84.574 ; R4.2@110.8,85.15 110.8,84.574 ; R4.2@110.924,84.748 ccw(c110.985,84.574) 110.8,84.574 ; R4.2@111.1,84.734 R4.2@111.125,84.709 ; R4.2@111.125,84.912 R4.2@111.125,84.709 ; 110.753,84.337 R4.2@111.125,84.709 ; 110.753,84.337 110.563,84.337 110.8,84.574
  Bottom Layer w0.254: v1(97.206,80.035) 97.963,80.793 98.563,80.793 100.472,82.702 102.387,82.702 v1(103.022,83.337) ; v1@97.206,80.208 ccw(c97.206,80.626) 97.501,80.331 ccw(c97.796,80.035) v1@97.379,80.035 ; v1@102.849,83.337 cw(c102.432,83.337) 102.727,83.042 cw(c103.022,82.747) v1@103.022,83.164
YS_D: U1.4 YS.2 | length 18.4
  Top Layer w0.254: U1.4@99.825,85.478 104.932,85.471 v1(105.081,85.321) ; U1.4@100.437,85.39 cw(c100.645,85.182) 100.645,85.476 ; U1.4@100.437,85.564 ccw(c100.649,85.776) 100.649,85.476 ; 104.302,85.472 cw(c104.3,84.542) v1@104.959,85.198
  Bottom Layer w0.254: v1(105.081,85.321) 107.289,87.528 111.252,87.528 112.206,86.574 112.409,86.574 ; v1@105.081,85.494 ccw(c105.081,85.911) 105.377,85.616 ccw(c105.672,85.321) v1@105.254,85.321
  Bottom Layer w0.6: 112.409,86.574 112.903,86.081 YS.2@113.995,86.081 ; 113.104,86.081 cw(c113.104,85.044) YS.2@113.837,85.777
ZFKZ: 
pads on no net: U4.6
copper on no net: | length 2.5
  Top Layer w0.5: 111.785,62.636 111.785,64.059
  Bottom Layer w0.15: 89.789,64.668 90.881,64.668
  other v7: 82.557,57.679 125.775,60.079 89.13,119.579 119.262,119.579

## Polygon pours and split planes (outlines as drawn)
GND on Top Layer "Top Layer-No Net" (hatched 90Degree grid 0.508 track 0.203, remove dead copper, pour order 4): 81.276,30.218 80.78,30.218 80.569,30.429 80,30.998 80,31.494 80,48.768 86.157,48.768 86.157,51.46 85.75,51.867 85.75,52.095 80.025,52.095 80,52.121 80,53.645 85.014,53.645 85.268,53.899 86.385,55.016 86.385,55.321 86.385,60.96 86.233,61.112 84.938,62.408 80.086,62.408 80.086,97.143 80,97.229 81.45,98.679 83.185,98.679 83.185,98.704 84.709,100.228 84.861,100.076 86,100.076 86,115.286 86.03,115.316 86.047,115.333 91.825,115.333 91.825,104.238 92.964,103.099 93.701,103.835 113.055,103.835 113.055,104.038 113.614,104.597 113.589,104.623 113.589,113.614 122.199,113.614 122.276,113.69 122.311,113.655 122.311,99.862 124.064,99.862 125.552,98.374 125.603,98.425 126.695,98.425 127.071,98.425 128.5,96.996 128.5,59.415 128.5,58.447 127.864,57.81 127.508,57.455 127.127,57.455 124.282,57.455 124.206,57.379 123.52,58.064 123.088,58.064 123.088,58.674 122.733,59.03 122.733,61.29 121.996,62.027 121.923,62.1 121.53,62.1 100.613,62.1 100.584,62.128 100.508,62.052 100,62.052 99.924,62.052 99.238,61.366 99,61.129 99,60.123 99,31.5 98.984,31.484 98.984,30.836 98.933,30.836 98.4,30.302 98.316,30.218 97.726,30.218 81.276,30.218
GND on Bottom Layer "Top Layer-No Net" (solid, remove dead copper, pour order 3): 81.276,30.218 80.78,30.218 80.569,30.429 80,30.998 80,31.494 80,48.768 86.157,48.768 86.157,51.46 85.75,51.867 85.75,52.095 80.025,52.095 80,52.121 80,53.645 85.014,53.645 85.268,53.899 86.385,55.016 86.385,55.321 86.385,60.96 86.233,61.112 84.938,62.408 80.086,62.408 80.086,97.143 80,97.229 81.45,98.679 83.185,98.679 83.185,98.704 84.709,100.228 84.861,100.076 86,100.076 86,115.286 86.03,115.316 86.047,115.333 91.825,115.333 91.825,104.238 92.964,103.099 93.701,103.835 113.055,103.835 113.055,104.038 113.614,104.597 113.589,104.623 113.589,113.614 122.199,113.614 122.276,113.69 122.311,113.655 122.311,99.862 124.064,99.862 125.552,98.374 125.603,98.425 126.695,98.425 127.071,98.425 128.5,96.996 128.5,59.415 128.5,58.447 127.864,57.81 127.508,57.455 127.127,57.455 124.282,57.455 124.206,57.379 123.52,58.064 123.088,58.064 123.088,58.674 122.733,59.03 122.733,61.29 121.996,62.027 121.923,62.1 121.53,62.1 100.613,62.1 100.584,62.128 100.508,62.052 100,62.052 99.924,62.052 99.238,61.366 99,61.129 99,60.123 99,31.5 98.984,31.484 98.984,30.836 98.933,30.836 98.4,30.302 98.316,30.218 97.726,30.218 81.276,30.218

## Keep-outs
Keep-Out Layer:
  circle w0.1: c89.13,119.579 r1.45
  circle w0.1: c119.262,119.579 r1.45
  circle w0.1: c82.557,57.679 r1.45
  lines w0.1: 80,58.793 80,78.216 cw(c80.562,78.216) 80.562,78.778 ; 80,59.154 80,31.494 ccw(c81.276,31.494) 81.276,30.218 97.726,30.218 ccw(c97.718,31.5) 99,31.5 99,60.123 cw(c100.977,60.123) 100.977,62.1 121.53,62.1 cw(c121.53,60.884) 122.746,60.884 122.746,59.436 ccw(c124.8,59.436) 124.8,57.382 ; 80,81.955 80,97.229 85.95,99.929 86,99.979 86,119.634 cw(c88.245,119.634) 88.245,121.879 ; 80.01,81.955 ccw(c80.626,81.955) 80.626,81.339 ; 80.562,78.779 83,78.779 ; 80.626,81.339 83,81.339 ; 83,78.809 83,81.309 ; 86,66.2 94.4,66.2 ; 86,66.232 86,67.462 ; 86,67.502 94.4,67.502 ; 88.195,121.879 90.922,121.879 92.431,120.371 99.187,120.371 100.695,121.879 107.458,121.879 108.737,120.599 111.76,120.599 113.04,121.879 120.141,121.879 ; 94.4,66.232 94.4,67.462 ; 119.941,121.879 cw(c119.941,119.57) 122.25,119.57 122.25,100.029 122.311,99.862 128.5,96.996 128.5,81.869 ; 124.8,57.382 126.467,57.382 ccw(c126.467,59.415) 128.5,59.415 128.5,78.096 ; 125.48,78.809 125.48,81.309 ; 125.495,78.779 127.787,78.779 ; 125.495,81.339 127.94,81.339 ccw(c127.94,81.899) 128.5,81.899 ; 127.787,78.779 cw(c127.787,78.066) 128.5,78.066 ; 87.757,113.673 87.757,115.333 91.825,115.333 91.825,113.673 87.757,113.673 ; 93.218,106.274 94.005,105.486 107.442,105.486 108.356,106.401 108.356,117.043 107.239,118.161 94.082,118.161 93.218,117.297 93.218,106.274 ; 109.728,113.673 109.728,115.333 118.085,115.333 118.085,113.673 109.728,113.673
  lines w0.15: 89.789,64.668 89.789,65.801

## Other copper
Top Layer:
  rectangle net GND: 97.307,34.976 98.171,35.839
  rectangle net GND: 90.653,34.061 91.415,34.9
  rectangle net GND: 83.287,34.646 86.055,37.973
  rectangle net NetC4_1: 98.4,67.054 100.046,70.714
  rectangle net NetC4_1: 99.314,65.049 100.635,69.139
  rectangle net NetC4_1: 100.178,65.634 101.194,76.835
  rectangle net NetC4_2: 103.581,65.405 105.029,69.825
  rectangle net NetC4_2: 102.189,65.583 103.759,74.143
  rectangle net 8.4V: 120.32,68.859 122.346,75.566
  rectangle net 8.4V: 120.345,73.406 122.174,75.514
  rectangle net BT: 121.488,76.759 122.453,78.867
  rectangle net BT: 115.087,65.938 118.059,73.203
  rectangle net BT: 113.817,73.025 117.983,77.14
  rectangle net GND: 106.248,80.493 118.415,82.525
  rectangle net GND: 118.262,80.01 124.003,82.88
  rectangle net BT: 106.985,76.759 121.641,78.765
  rectangle net NetC4_1: 100.635,75.082 103.149,76.632
  rectangle net BT: 114.808,64.313 117.653,66.599
  rectangle net GND: 86.563,36.373 88.951,38.622
  rectangle net GND: 87.339,38.709 89.84,40.589
  rectangle net GND: 101.6,77.902 105.125,81.686
  rectangle net 5V: 89.764,42.367 91.008,45.009
  region net GND: 94.844,32.207 94.844,35.027 91.161,35.027 91.161,32.207
  rectangle net TY: 95.961,31.191 97.917,33.198
  rectangle net GND: 91.161,31.42 93.37,33.985
Bottom Layer:
  rectangle net NetC4_2: 102.184,66.243 103.911,66.929
  rectangle net BT: 81.686,47.898 83.05,52.324
  rectangle net GND: 89.408,31.369 92.481,34.468
  rectangle net NetC4_1: 99.136,66.116 100.584,67.513
  rectangle net GND: 108.001,70.256 112.37,71.399
  rectangle net GND: 110.744,70.383 112.928,71.653
  rectangle net GND: 100.381,79.781 101.638,80.645
  rectangle net GND: 99.924,78.359 101.676,80.112
  rectangle net GND: 101.346,78.562 105.207,81.61
  rectangle net GND: 112.928,64.389 113.563,66.167
  rectangle net BT: 114.757,68.402 117.526,70.688
  rectangle net GND: 85.95,43.917 88.138,47.803
  rectangle net NetC4_1: 98.273,67.513 98.781,68.428
  rectangle net NetC4_1: 98.654,66.98 100.99,68.834
  rectangle net NetC4_1: 100.279,66.167 100.94,70.51
  rectangle net NetC4_2: 102.159,68.123 103.683,71.399
  rectangle net NetC4_2: 101.956,66.751 104.521,69.952
  rectangle net GND: 86.462,39.243 89.421,40.945
  rectangle net BT: 115.087,68.758 117.907,72.822
  rectangle net 8.4V: 119.583,68.682 122.301,74.447
  rectangle net BT: 114.833,73.914 117.704,77.572
  rectangle net GND: 104.572,79.223 106.172,81.432
  rectangle net GND: 105.639,80.315 121.488,82.499
  rectangle net BT: 106.832,77.013 121.742,78.842
  rectangle net GND: 106.07,100.432 107.798,102.464
  rectangle net GND: 86.106,63.373 88.951,64.643
  rectangle net GND: 89.023,37.059 91.08,40.437
  rectangle net GND: 87.173,36.322 94.59,43.104
  rectangle net GND: 88.036,41.91 92.481,62.992
  rectangle net GND: 94.234,42.164 95.25,52.502
  rectangle net GND: 87.732,35.56 95.733,62.763

## Silkscreen, mask and mechanical layers (free items; w line width, h text height)
Top Overlay:
  circle w0.16: c125.175,84.532 r2.5
  circle w0.18: c84.556,47.93 r3.15
  lines w0.16: 109.601,95.479 109.601,96.926 112.319,96.926 112.319,95.479 109.601,95.479 ; 110.338,108.737 110.338,111.277 111.836,111.277 111.836,108.737 110.338,108.737 ; 115.621,96.901 117.069,96.901 117.069,99.543 115.621,99.543 115.621,96.901
  lines w0.2: 92.812,30.556 96.672,30.556 ; 94.894,102.006 94.894,105.08 ; 94.894,118.389 94.894,120.142 ; 107.29,101.776 107.29,105.029
  lines w0.22: 117.096,63.629 120.5,63.629 ; 117.125,63.598 117.125,68.729 ; 117.125,68.727 111.121,68.727 111.121,76.116 123.999,76.116 ; 120.5,63.598 120.5,68.729 ; 120.525,68.729 123.973,68.727 123.973,76.116 ; 122.475,81.748 127.825,81.748 ; 122.475,81.823 122.475,85.95 123.778,87.253 ; 123.825,87.273 127.85,87.273 127.85,81.773 ; 127.85,81.779 127.875,81.804 ; 81.198,46.488 81.198,51.219 87.924,51.219 87.917,44.619 83.067,44.619 81.198,46.488
  text "-R" at 107.671,118.796 h1.3
  text "G-" at 98.45,118.669 h1.3
  text "BC2" at 92.939,116.611 h0.85 r90
  text "GND" at 87.325,116.002 h0.85 r90
  text "GND" at 119.482,113.335 h1 r90
  text "HWP" at 109.499,113.309 h0.9 r90
  text "BC1" at 87.376,111.938 h0.9 r90
  text "M1" at 100.406,102.845 h1.6
  text "GND" at 84.861,97.155 h0.9
  text "CE" at 99.67,96.698 h0.9 r90
  text "IRQ" at 106.045,95.936 h0.9 r90
  text "3V3" at 97.028,95.809 h0.9 r90
  text "GND" at 98.374,95.809 h0.9 r90
  text "SCK" at 102.184,95.733 h0.9 r90
  text "CSN" at 100.889,95.656 h0.9 r90
  text "MOSI" at 103.429,95.148 h0.9 r90
  text "MISO" at 104.699,95.047 h0.9 r90
  text "16" at 91.821,91.034 h0.7
  text "RST" at 119.151,86.309 h0.8
  text "+" at 120.066,83.642 h1.8
  text "1" at 100.609,81.661 h0.8
  text "+" at 122.885,77.318 h2.5
  text "+" at 117.323,77.14 h2.5
  text "+" at 112.395,76.886 h2.5
  text "Y>" at 92.989,73.584 h1 r90
  text "GN" at 97.028,73.508 h1 r90
  text "3.3V" at 86.919,73.482 h1 r90
  text "AM" at 90.881,73.482 h1 r90
  text "Y30" at 88.951,73.457 h1 r90
  text "<Z" at 94.971,73.431 h1 r90
  text "NTC" at 125.603,73.177 h0.8 r90
  text "-" at 125.806,71.145 h2.3
  text "BAT" at 116.484,69.748 h1 r90
  text "8.4V" at 121.818,69.672 h1 r90
  text "SWIM" at 86.309,69.367 h0.8
  text "RST" at 91.796,69.291 h0.8
  text "+" at 96.19,64.999 h2
  text "5V" at 89.332,63.576 h1
  text "+" at 92.024,62.433 h2
  text "-" at 86.665,62.306 h2.2
  text "+" at 80.239,44.729 h2
  text "BH" at 80.975,31.699 h1.2
  text "+" at 98.958,31.217 h1.5 r90
  text "G" at 89.484,30.785 h0.8
  text "1" at 85.065,30.759 h0.8
  text "2" at 86.462,30.759 h0.8
  text "VC" at 87.605,30.759 h0.8
Bottom Overlay:
  circle w0.2: c84.497,49.733 r2.6
  lines w0.16: 95.021,101.776 95.021,105.181 ; 96.19,95.123 96.19,93.32 96.596,92.913 104.75,92.913 105.105,93.269 105.105,95.199 ; 97.46,95.199 97.46,93.751 97.485,93.726 106.553,93.726 106.655,93.828 106.655,95.275 ; 98.6,70.028 98.6,63.119 104.369,63.119 104.369,69.875 104.521,70.028 98.628,70.028 ; 106.756,101.879 106.756,105.054
  lines w0.25: 96.063,101.956 96.063,105.029 ; 108.001,101.802 108.001,105.054
  lines w0.254: 90.932,117.069 92.024,118.161 ; 91.592,110.846 92.685,111.938 ; 91.618,111.938 92.71,110.846 ; 113.182,117.043 114.275,118.135 ; 113.208,118.135 114.3,117.043
  text "BC2" at 94.107,118.694 h0.8
  text "-G" at 99.898,118.643 h1.2
  text "R-" at 110.211,118.567 h1.2
  text "GND" at 87.351,118.161 h0.85 r90
  text "HWPOW" at 109.576,116.713 h0.9 r90
  text "GND" at 119.964,116.408 h1.2 r90
  text "BC1" at 87.452,113.309 h0.8 r90
  text "FL" at 114.427,110.414 h1.2
  text "SCK" at 101.778,98.146 h0.9 r90
  text "GND" at 107.213,98.12 h0.9 r90
  text "IRQ" at 97.917,98.095 h0.9 r90
  text "3V3" at 105.664,98.095 h0.9 r90
  text "MISO" at 99.212,98.069 h0.9 r90
  text "CE" at 104.343,98.069 h0.9 r90
  text "GND" at 85.115,98.044 h1 r180
  text "CSN" at 103.048,98.044 h0.9 r90
  text "GND" at 96.698,98.019 h0.9 r90
  text "MOSI" at 100.482,97.993 h0.9 r90
  text "3.3" at 118.796,95.936 h1
  text "SWIM" at 118.847,93.32 h1
  text "GND" at 118.593,90.932 h1
  text "RST" at 118.415,88.265 h1
  text "YS" at 112.192,85.395 h1.5
  text "BT" at 120.98,84.404 h1.5 r90
  text "+" at 123.469,77.394 h2
  text "AM" at 90.043,73.66 h1 r270
  text "8.4V" at 121.818,73.482 h1 r90
  text "GND" at 96.012,73.457 h1 r270
  text "3.3V" at 86.106,73.431 h1 r270
  text "Y>" at 91.948,73.431 h1 r270
  text "<Z" at 93.949,73.431 h1 r270
  text "Y30" at 87.96,73.406 h1 r270
  text "BT" at 117.018,71.984 h1.4
  text "GND" at 86.004,64.11 h1.15 r180
  text "MO" at 102.616,63.602 h1.5
  text "+" at 93.37,62.255 h2.2
  text "DC 5V" at 93.091,60.681 h1.2
  text "2000ma" at 93.701,58.699 h1.2
  text "C1" at 87.028,52.615 h1.2
  text "+" at 81.509,49.53 h1.8
  text "BC1" at 84.176,43.485 h1.2
  text "201901016LOOCC" at 90.475,43.028 h1 r270
  text "BC2" at 84.633,39.065 h1.2
  text "BH1" at 84.531,34.061 h1 r270
  text "BH2" at 86.131,34.061 h1 r270
  text "GND" at 89.205,34.011 h1 r270
  text "3.3V" at 87.757,33.985 h1 r270
  text "+" at 98.298,32.233 h1.5 r90
  text "TY" at 93.294,31.928 h1.2
Top Solder:
  lines w0.7: 103.048,76.683 101.041,76.683 ; 101.041,76.683 100.373,76.683 99.72,76.03 99.72,73.152 100.355,73.787 100.355,75.997 101.041,76.683
  lines w1: 102.26,75.616 102.26,76.505 ; 102.286,72.949 102.286,73.889
Bottom Solder:
  rectangle: 87.224,34.747 95.529,62.001